# Altium PCB lab1_patrusheva_usb_spi.PcbDoc
Units mm, origin at the board's own origin, x right, y up, seen from the top; angles counter-clockwise.
Board outline 46.35 x 20.55 mm, 4 copper layers (Top Layer, Signal Layer 1, Signal Layer 2, Bottom Layer), stack 1.522 mm thick; 22 components, 24 nets, 79 pads, 70 vias.
Unrouted connection lines stored in the file: 8.
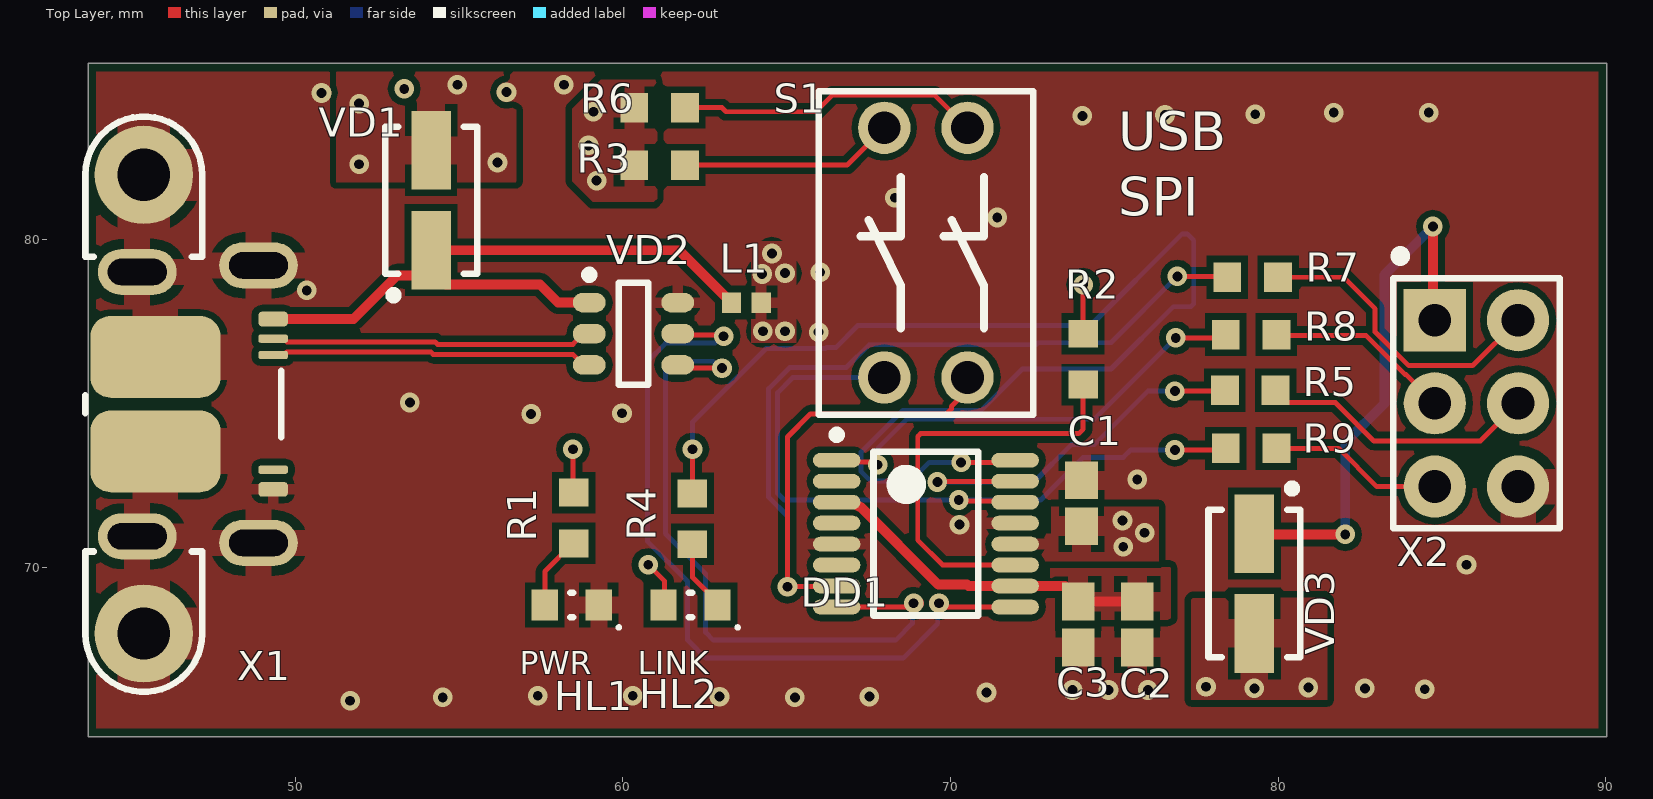
[diagram p0: Top Layer view]
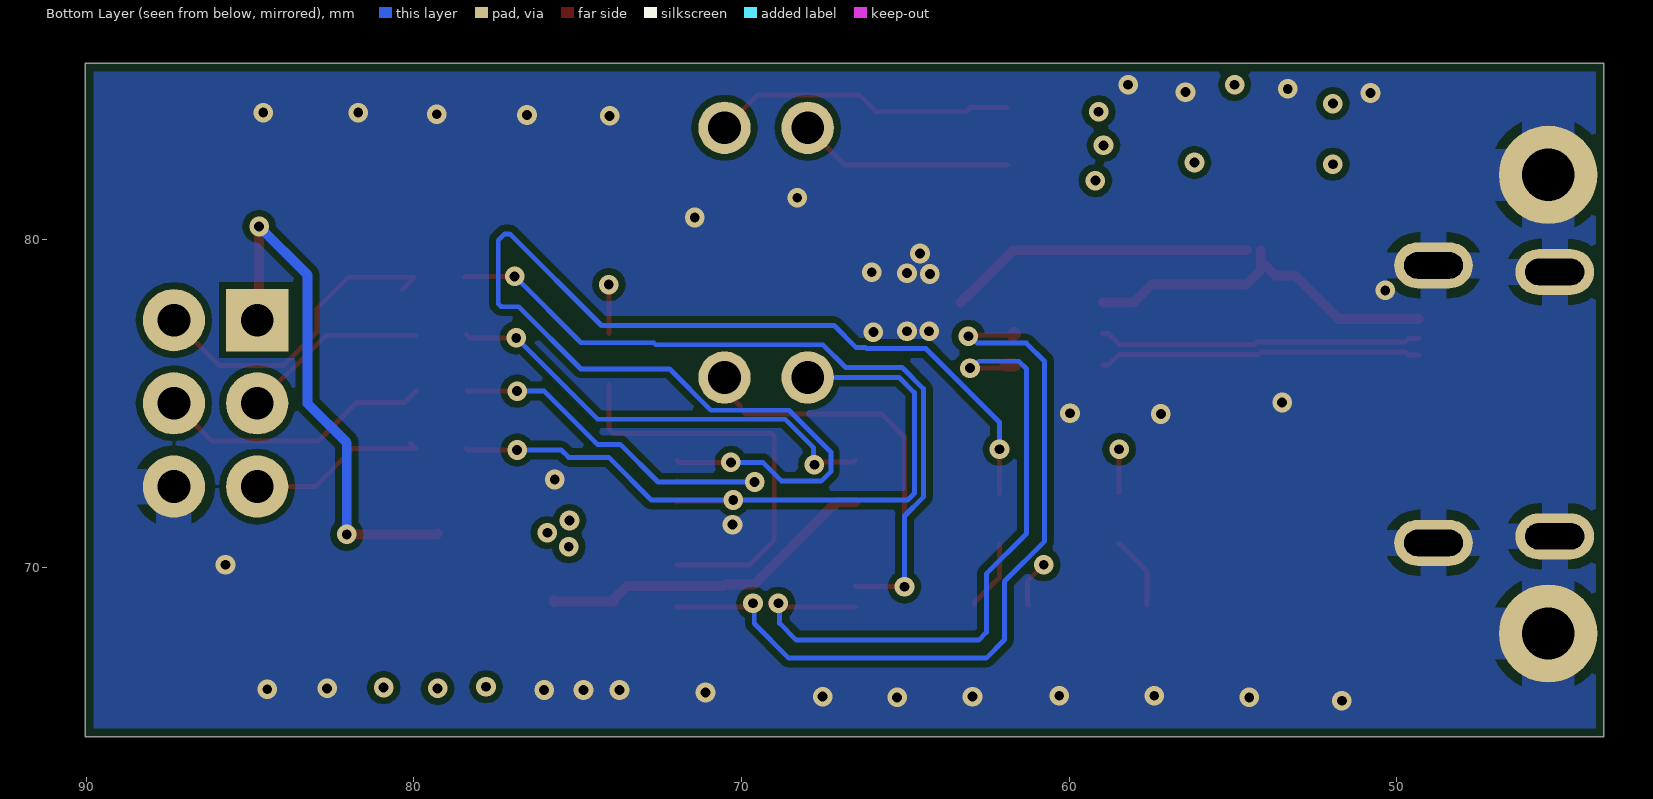
[diagram p1: Bottom Layer view, seen from below]
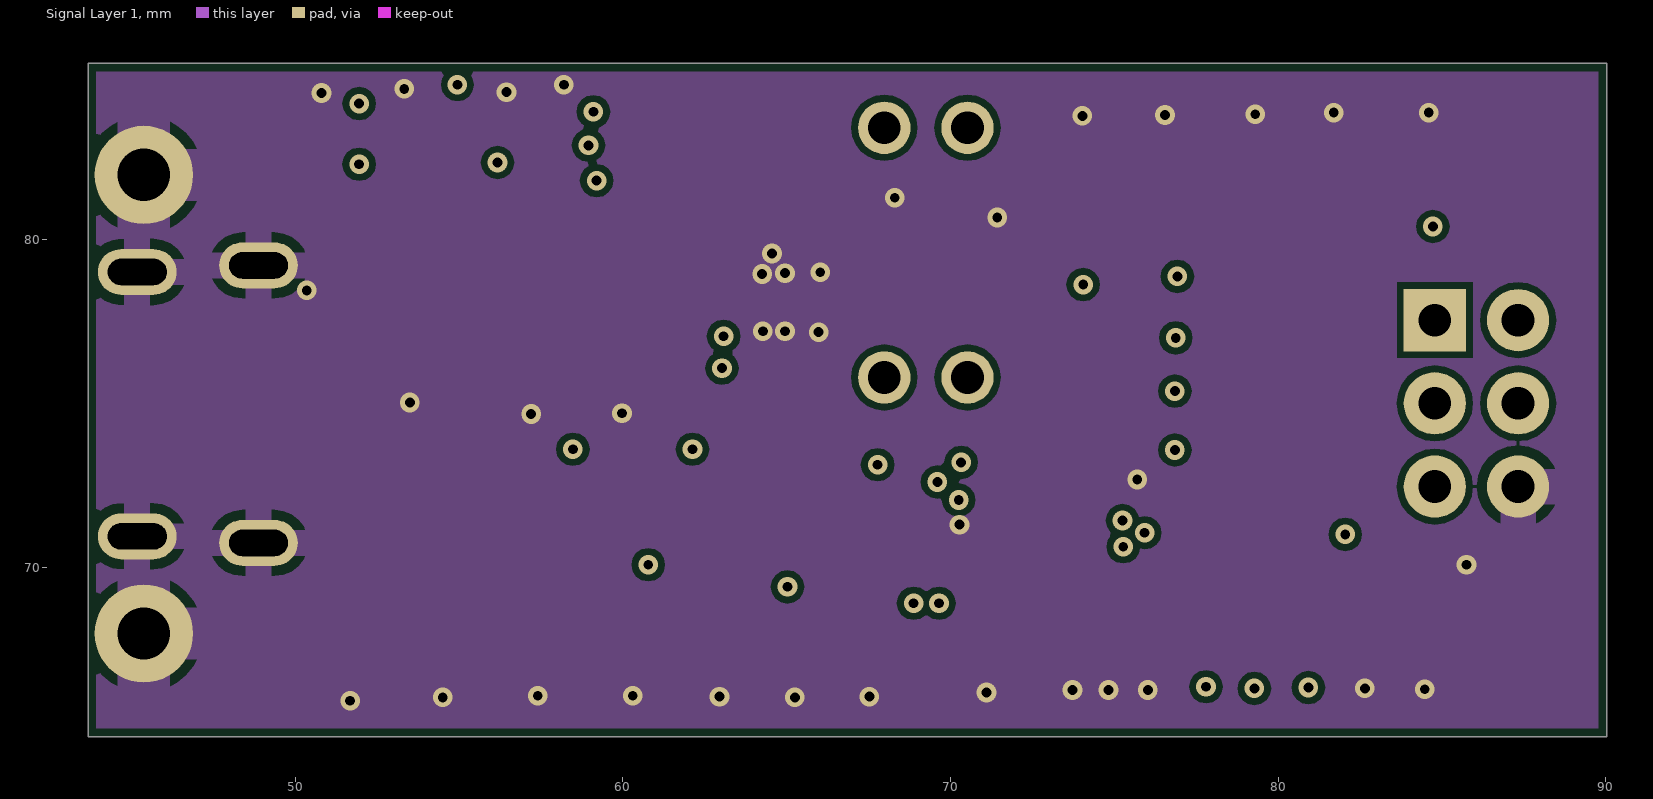
[diagram p2: Signal Layer 1]
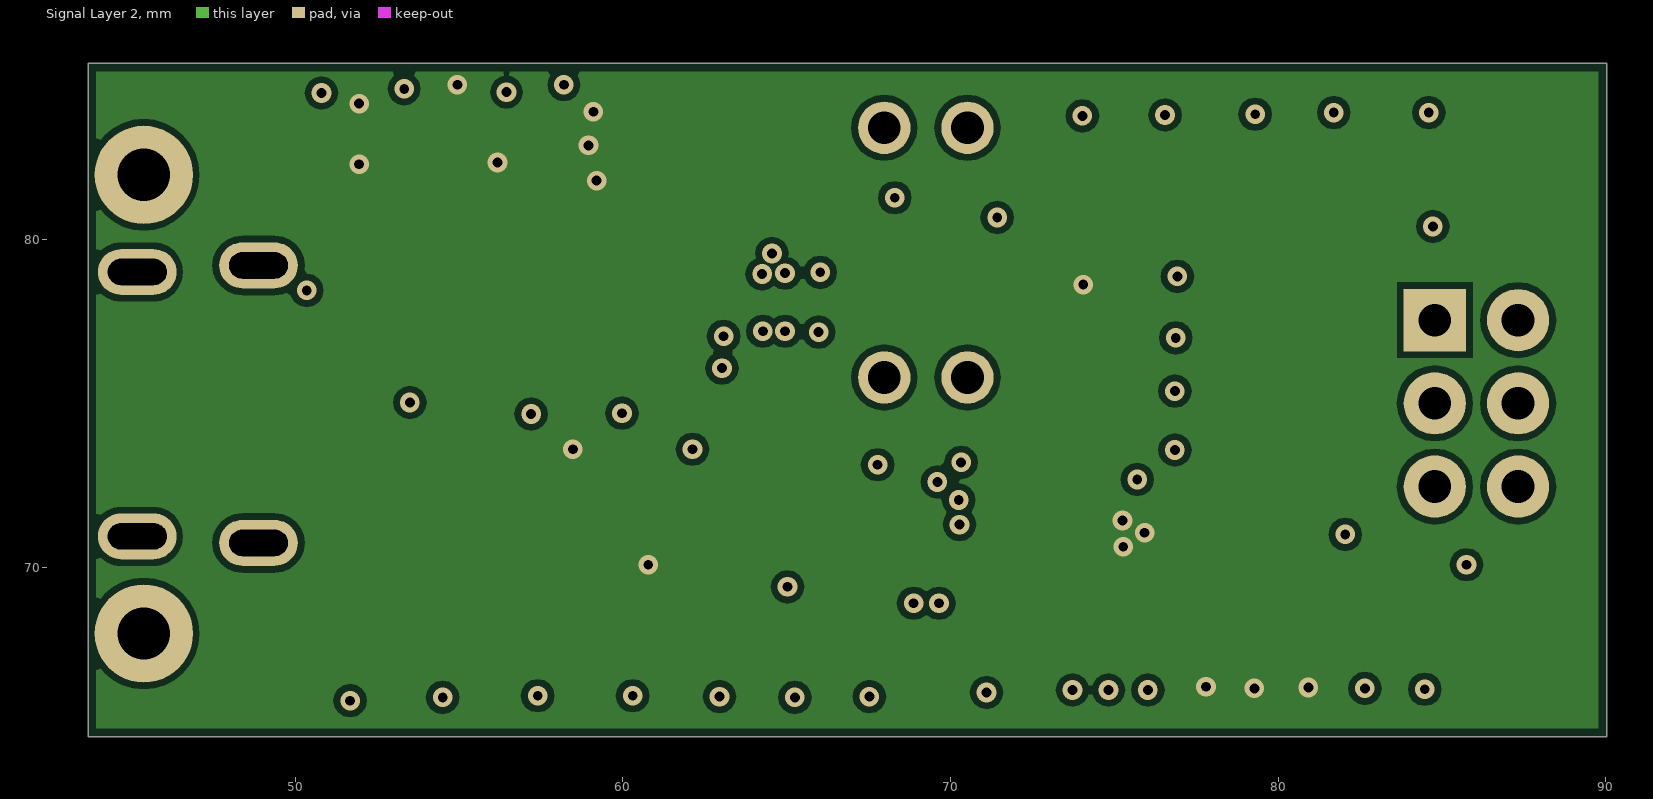
[diagram p3: Signal Layer 2]

## Layer stack, top to bottom
Top Solder: solder mask 0.0102, Solder Resist, Dk 3.5
Top Layer: signal copper 0.018
Prepreg 1: prepreg 0.125, FR4 HiTg170, Dk 5.07
Signal Layer 1: signal copper 0.018
Core 1: core 1.2, FR4, Dk 4.6
Signal Layer 2: signal copper 0.018
Prepreg 2: prepreg 0.125, FR4 HiTg170, Dk 5.07
Bottom Layer: signal copper 0.018
Bottom Solder: solder mask 0.0102, Solder Resist, Dk 3.5

## Board outline
43.675,64.825 90.025,64.825 90.025,85.375 43.675,85.375

## Design rules (kind name [scope] priority, off if disabled: settings)
AcuteAngle min_acute_angle [OnCopper] p1: minimum=3.50000000000000E+0001 checktracksonly=FALSE // Минимальный угол между примитивами топологии
BoardOutlineClearance board_outline_clearance_std [NOT (OnLayer('Bottom Overlay') OR OnLayer('Top Overlay'))] p1: gap=0.25 ignorepadtopadclearanceinfootprint=FALSE except(0: Arc-SplitContinuation Track-SplitContinuation SMDPad-SplitContinuation THPad-SplitContinuation Via-SplitContinuation Fill-SplitContinuation Poly-SplitContinuation Region-SplitContinuation Text-SplitContinuation) // Отступ элементов топологии от края фрезеруемой печатной платы
Clearance clearance_outer_18um_std [OnTopLayer OR OnBottomLayer] p1: gap=0.125 ignorepadtopadclearanceinfootprint=TRUE except(0.2: Arc-Fill Arc-Poly Track-Fill Track-Poly SMDPad-SMDPad SMDPad-Fill SMDPad-Poly THPad-Fill THPad-Poly Via-Fill Via-Poly Fill-Fill Fill-Poly Poly-Poly Poly-Region Poly-Text; 0.25: Arc-Hole Track-Hole SMDPad-Hole THPad-Hole Via-Hole Fill-Hole Poly-Hole Region-Hole Text-Hole) // Зазоры на внешних слоях
Clearance clearance_inner_18um_std [NOT (OnTopLayer Or OnBottomLayer)] p2: gap=0.125 ignorepadtopadclearanceinfootprint=FALSE except(0.2: Arc-Fill Arc-Poly Track-Fill Track-Poly SMDPad-SMDPad SMDPad-Fill SMDPad-Poly THPad-Fill THPad-Poly Via-Fill Via-Poly Fill-Fill Fill-Poly Poly-Poly Poly-Region Poly-Text; 0.25: Arc-Hole Track-Hole SMDPad-Hole THPad-Hole Via-Hole Fill-Hole Poly-Hole Region-Hole Text-Hole) // Зазоры на внутренних слоях
ComponentClearance [All] p1: gap=0 collisioncheckmode=3 verticalgap=0 showdistances=FALSE
DiffPairsRouting "Schematic Differential Pairs Routing_15" [InNet('CN_D_N')] p1: maxlimit=0.254 minlimit=0.15 mostfreqgap=0.254 toplayer_maxgap=0.15 toplayer_prefgap=0.15 toplayer_minwidth=0.155 toplayer_maxwidth=0.155 toplayer_prefwidth=0.155 bottomlayer_maxgap=0.15 bottomlayer_prefgap=0.15 bottomlayer_minwidth=0.155 bottomlayer_maxwidth=0.155 bottomlayer_prefwidth=0.155 impedanceprofiledriven=TRUE impedanceprofileid={1B1F1868-2FFB-4D51-908A-913D90CA9AFC} impedanceprofilevalue=95.000000 maxuncoupledlength=12.7
DiffPairsRouting "Schematic Differential Pairs Routing_14" [InNet('CN_D_P')] p2: maxlimit=0.254 minlimit=0.15 mostfreqgap=0.254 toplayer_maxgap=0.15 toplayer_prefgap=0.15 toplayer_minwidth=0.155 toplayer_maxwidth=0.155 toplayer_prefwidth=0.155 bottomlayer_maxgap=0.15 bottomlayer_prefgap=0.15 bottomlayer_minwidth=0.155 bottomlayer_maxwidth=0.155 bottomlayer_prefwidth=0.155 impedanceprofiledriven=TRUE impedanceprofileid={1B1F1868-2FFB-4D51-908A-913D90CA9AFC} impedanceprofilevalue=95.000000 maxuncoupledlength=12.7
DiffPairsRouting "Schematic Differential Pairs Routing_13" [InNet('USB_D_N')] p3: maxlimit=0.254 minlimit=0.15 mostfreqgap=0.254 toplayer_maxgap=0.15 toplayer_prefgap=0.15 toplayer_minwidth=0.155 toplayer_maxwidth=0.155 toplayer_prefwidth=0.155 bottomlayer_maxgap=0.15 bottomlayer_prefgap=0.15 bottomlayer_minwidth=0.155 bottomlayer_maxwidth=0.155 bottomlayer_prefwidth=0.155 impedanceprofiledriven=TRUE impedanceprofileid={1B1F1868-2FFB-4D51-908A-913D90CA9AFC} impedanceprofilevalue=95.000000 maxuncoupledlength=12.7
DiffPairsRouting "Schematic Differential Pairs Routing_12" [InNet('USB_D_P')] p4: maxlimit=0.254 minlimit=0.15 mostfreqgap=0.254 toplayer_maxgap=0.15 toplayer_prefgap=0.15 toplayer_minwidth=0.155 toplayer_maxwidth=0.155 toplayer_prefwidth=0.155 bottomlayer_maxgap=0.15 bottomlayer_prefgap=0.15 bottomlayer_minwidth=0.155 bottomlayer_maxwidth=0.155 bottomlayer_prefwidth=0.155 impedanceprofiledriven=TRUE impedanceprofileid={1B1F1868-2FFB-4D51-908A-913D90CA9AFC} impedanceprofilevalue=95.000000 maxuncoupledlength=12.7
DiffPairsRouting "Schematic Differential Pairs Routing_11" [InNet('USB_D_N')] p5: maxlimit=0.254 minlimit=0.15 mostfreqgap=0.254 toplayer_maxgap=0.15 toplayer_prefgap=0.15 toplayer_minwidth=0.155 toplayer_maxwidth=0.155 toplayer_prefwidth=0.155 bottomlayer_maxgap=0.15 bottomlayer_prefgap=0.15 bottomlayer_minwidth=0.155 bottomlayer_maxwidth=0.155 bottomlayer_prefwidth=0.155 impedanceprofiledriven=TRUE impedanceprofileid={1B1F1868-2FFB-4D51-908A-913D90CA9AFC} impedanceprofilevalue=95.000000 maxuncoupledlength=12.7
DiffPairsRouting "Schematic Differential Pairs Routing_10" [InNet('USB_D_P')] p6: maxlimit=0.254 minlimit=0.15 mostfreqgap=0.254 toplayer_maxgap=0.15 toplayer_prefgap=0.15 toplayer_minwidth=0.155 toplayer_maxwidth=0.155 toplayer_prefwidth=0.155 bottomlayer_maxgap=0.15 bottomlayer_prefgap=0.15 bottomlayer_minwidth=0.155 bottomlayer_maxwidth=0.155 bottomlayer_prefwidth=0.155 impedanceprofiledriven=TRUE impedanceprofileid={1B1F1868-2FFB-4D51-908A-913D90CA9AFC} impedanceprofilevalue=95.000000 maxuncoupledlength=12.7
DiffPairsRouting "Schematic Differential Pairs Routing_9" [InNet('CN_D_N')] p7: maxlimit=0.254 minlimit=0.15 mostfreqgap=0.254 toplayer_maxgap=0.15 toplayer_prefgap=0.15 toplayer_minwidth=0.155 toplayer_maxwidth=0.155 toplayer_prefwidth=0.155 bottomlayer_maxgap=0.15 bottomlayer_prefgap=0.15 bottomlayer_minwidth=0.155 bottomlayer_maxwidth=0.155 bottomlayer_prefwidth=0.155 impedanceprofiledriven=TRUE impedanceprofileid={1B1F1868-2FFB-4D51-908A-913D90CA9AFC} impedanceprofilevalue=95.000000 maxuncoupledlength=12.7
DiffPairsRouting "Schematic Differential Pairs Routing_8" [InNet('CN_D_N')] p8: maxlimit=0.254 minlimit=0.15 mostfreqgap=0.254 toplayer_maxgap=0.15 toplayer_prefgap=0.15 toplayer_minwidth=0.155 toplayer_maxwidth=0.155 toplayer_prefwidth=0.155 bottomlayer_maxgap=0.15 bottomlayer_prefgap=0.15 bottomlayer_minwidth=0.155 bottomlayer_maxwidth=0.155 bottomlayer_prefwidth=0.155 impedanceprofiledriven=TRUE impedanceprofileid={1B1F1868-2FFB-4D51-908A-913D90CA9AFC} impedanceprofilevalue=95.000000 maxuncoupledlength=12.7
DiffPairsRouting "Schematic Differential Pairs Routing_7" [InNet('CN_D_P')] p9: maxlimit=0.254 minlimit=0.15 mostfreqgap=0.254 toplayer_maxgap=0.15 toplayer_prefgap=0.15 toplayer_minwidth=0.155 toplayer_maxwidth=0.155 toplayer_prefwidth=0.155 bottomlayer_maxgap=0.15 bottomlayer_prefgap=0.15 bottomlayer_minwidth=0.155 bottomlayer_maxwidth=0.155 bottomlayer_prefwidth=0.155 impedanceprofiledriven=TRUE impedanceprofileid={1B1F1868-2FFB-4D51-908A-913D90CA9AFC} impedanceprofilevalue=95.000000 maxuncoupledlength=12.7
DiffPairsRouting "Schematic Differential Pairs Routing_6" [InNet('CN_D_P')] p10: maxlimit=0.254 minlimit=0.15 mostfreqgap=0.254 toplayer_maxgap=0.15 toplayer_prefgap=0.15 toplayer_minwidth=0.155 toplayer_maxwidth=0.155 toplayer_prefwidth=0.155 bottomlayer_maxgap=0.15 bottomlayer_prefgap=0.15 bottomlayer_minwidth=0.155 bottomlayer_maxwidth=0.155 bottomlayer_prefwidth=0.155 impedanceprofiledriven=TRUE impedanceprofileid={1B1F1868-2FFB-4D51-908A-913D90CA9AFC} impedanceprofilevalue=95.000000 maxuncoupledlength=12.7
DiffPairsRouting "Schematic Differential Pairs Routing_5" [InNet('USB_D_P')] p11: maxlimit=0.254 minlimit=0.15 mostfreqgap=0.254 toplayer_maxgap=0.15 toplayer_prefgap=0.15 toplayer_minwidth=0.155 toplayer_maxwidth=0.155 toplayer_prefwidth=0.155 bottomlayer_maxgap=0.15 bottomlayer_prefgap=0.15 bottomlayer_minwidth=0.155 bottomlayer_maxwidth=0.155 bottomlayer_prefwidth=0.155 impedanceprofiledriven=TRUE impedanceprofileid={1B1F1868-2FFB-4D51-908A-913D90CA9AFC} impedanceprofilevalue=95.000000 maxuncoupledlength=12.7
DiffPairsRouting "Schematic Differential Pairs Routing_4" [InNet('USB_D_P')] p12: maxlimit=0.254 minlimit=0.15 mostfreqgap=0.254 toplayer_maxgap=0.15 toplayer_prefgap=0.15 toplayer_minwidth=0.155 toplayer_maxwidth=0.155 toplayer_prefwidth=0.155 bottomlayer_maxgap=0.15 bottomlayer_prefgap=0.15 bottomlayer_minwidth=0.155 bottomlayer_maxwidth=0.155 bottomlayer_prefwidth=0.155 impedanceprofiledriven=TRUE impedanceprofileid={1B1F1868-2FFB-4D51-908A-913D90CA9AFC} impedanceprofilevalue=95.000000 maxuncoupledlength=12.7
DiffPairsRouting "Schematic Differential Pairs Routing_3" [InNet('CN_D_N')] p13: maxlimit=0.15 minlimit=0.15 mostfreqgap=0.15 toplayer_minwidth=0.402 toplayer_maxwidth=0.485 toplayer_prefwidth=0.485 midlayer1_minwidth=0.381 midlayer1_maxwidth=0.381 midlayer1_prefwidth=0.381 midlayer2_minwidth=0.381 midlayer2_maxwidth=0.381 midlayer2_prefwidth=0.381 bottomlayer_minwidth=0.402 bottomlayer_maxwidth=0.485 bottomlayer_prefwidth=0.485 maxuncoupledlength=12.7
DiffPairsRouting "Schematic Differential Pairs Routing_2" [InNet('CN_D_P')] p14: maxlimit=0.15 minlimit=0.15 mostfreqgap=0.15 toplayer_minwidth=0.402 toplayer_maxwidth=0.485 toplayer_prefwidth=0.485 midlayer1_minwidth=0.381 midlayer1_maxwidth=0.381 midlayer1_prefwidth=0.381 midlayer2_minwidth=0.381 midlayer2_maxwidth=0.381 midlayer2_prefwidth=0.381 bottomlayer_minwidth=0.402 bottomlayer_maxwidth=0.485 bottomlayer_prefwidth=0.485 maxuncoupledlength=12.7
DiffPairsRouting diff_pairs_routing [All] p15: maxlimit=0.254 minlimit=0.127 mostfreqgap=0.254 toplayer_maxgap=0.127 toplayer_prefgap=0.127 toplayer_minwidth=0.143 toplayer_maxwidth=0.143 toplayer_prefwidth=0.143 midlayer1_minwidth=0.381 midlayer1_maxwidth=0.381 midlayer1_prefwidth=0.381 midlayer2_minwidth=0.381 midlayer2_maxwidth=0.381 midlayer2_prefwidth=0.381 bottomlayer_maxgap=0.127 bottomlayer_prefgap=0.127 bottomlayer_minwidth=0.143 bottomlayer_maxwidth=0.143 bottomlayer_prefwidth=0.143 impedanceprofiledriven=TRUE impedanceprofileid={FD46899E-B5A2-4EF5-A302-5D2DB6A51F35} maxuncoupledlength=12.7 // Правила трассировки дифференциальных пар
HoleSize min_hole_size_std [IsPad] p1: absolutevalues=TRUE maxlimit=5.9 minlimit=0.6 maxpercent=80.000 minpercent=20.000 // Диаметр межслойного переходного отверстия
HoleSize min_hole_size_via_std [IsVia] p2: absolutevalues=TRUE maxlimit=5.9 minlimit=0.3 maxpercent=80.000 minpercent=20.000 // Минимальный диаметр монтажного отверстия
HoleToHoleClearance hole_to_hole_clearance_std [All] p1: gap=0.2 allowstackedmicrovias=FALSE // Минимальное расстояние между краями двух отверстий
MinimumAnnularRing min_via_ar_std [All] p1: minimumring=0.15 // Поясок площадки переходного отверстия (Annular ring VIA)
MinimumAnnularRing min_pad_ar_std [All] p2: minimumring=0.2 // Поясок монтажной контактной площадки (Annular ring PAD)
MinimumSolderMaskSliver min_solder_mask_bridge_std [All] p1: minsoldermaskwidth=0.15 // Мнимальная ширина масочного мостика
PlaneClearance plane_clearance_18um_std [All] p1: clearance=0.2 // Отступ полигона (для слоя plane) от элементов топологии
PlaneConnect [All] p1: planeconnectstyle=Relief reliefexpansion=0.5 reliefentries=4 reliefconductorwidth=0.2 reliefairgap=0.2
PolygonConnect poly_connect_to_pad<=0.3 [(AsMM(PadXSize_AllLayers)<=0.301) or (AsMM(PadYSize_AllLayers)<=0.301)] p1: thpad.connectstyle=Relief thpad.reliefconductorwidth=0.2 thpad.reliefentries=4 thpad.polygonreliefangle="90 Angle" thpad.airgapwidth=0.2 smdpad.connectstyle=Relief smdpad.reliefconductorwidth=0.2 smdpad.reliefentries=4 smdpad.polygonreliefangle="90 Angle" smdpad.airgapwidth=0.2 via.connectstyle=Direct via.reliefconductorwidth=0.254 via.reliefentries=4 via.polygonreliefangle="90 Angle" via.airgapwidth=0.254 // Правила подключения полигонов для падов от 0,3мм и меньше
PolygonConnect poly_connect_to_pad<=0.4 [(AsMM(PadXSize_AllLayers)<=0.401) or (AsMM(PadYSize_AllLayers)<=0.401)] p2: thpad.connectstyle=Relief thpad.reliefconductorwidth=0.26 thpad.reliefentries=4 thpad.polygonreliefangle="90 Angle" thpad.airgapwidth=0.2 smdpad.connectstyle=Relief smdpad.reliefconductorwidth=0.26 smdpad.reliefentries=4 smdpad.polygonreliefangle="90 Angle" smdpad.airgapwidth=0.2 via.connectstyle=Direct via.reliefconductorwidth=0.254 via.reliefentries=4 via.polygonreliefangle="90 Angle" via.airgapwidth=0.254 // Правила подключения полигонов для падов от 0,4 и меньше
PolygonConnect poly_connect_to_pad<=0.6 [(AsMM(PadXSize_AllLayers)<=0.601) or (AsMM(PadYSize_AllLayers)<=0.601)] p3: thpad.connectstyle=Relief thpad.reliefconductorwidth=0.33 thpad.reliefentries=4 thpad.polygonreliefangle="90 Angle" thpad.airgapwidth=0.2 smdpad.connectstyle=Relief smdpad.reliefconductorwidth=0.33 smdpad.reliefentries=4 smdpad.polygonreliefangle="90 Angle" smdpad.airgapwidth=0.2 via.connectstyle=Direct via.reliefconductorwidth=0.254 via.reliefentries=4 via.polygonreliefangle="90 Angle" via.airgapwidth=0.254 // Правила подключения полигонов для падов от 0,6мм и меньше
PolygonConnect poly_connect_to_pad<=0.7 [(AsMM(PadXSize_AllLayers)<=0.701) or (AsMM(PadYSize_AllLayers)<=0.701)] p4: thpad.connectstyle=Relief thpad.reliefconductorwidth=0.46 thpad.reliefentries=4 thpad.polygonreliefangle="90 Angle" thpad.airgapwidth=0.2 smdpad.connectstyle=Relief smdpad.reliefconductorwidth=0.46 smdpad.reliefentries=4 smdpad.polygonreliefangle="90 Angle" smdpad.airgapwidth=0.2 via.connectstyle=Direct via.reliefconductorwidth=0.254 via.reliefentries=4 via.polygonreliefangle="90 Angle" via.airgapwidth=0.254 // Правила подключения полигонов для падов от 0,7мм и меньше
PolygonConnect poly_connect_to_pad<=0.8 [(AsMM(PadXSize_AllLayers)<=0.8)or(AsMM(PadYSize_AllLayers)<=0.8)] p5: thpad.connectstyle=Relief thpad.reliefconductorwidth=0.53 thpad.reliefentries=4 thpad.polygonreliefangle="90 Angle" thpad.airgapwidth=0.3 smdpad.connectstyle=Relief smdpad.reliefconductorwidth=0.53 smdpad.reliefentries=4 smdpad.polygonreliefangle="90 Angle" smdpad.airgapwidth=0.2 via.connectstyle=Direct via.reliefconductorwidth=0.254 via.reliefentries=4 via.polygonreliefangle="90 Angle" via.airgapwidth=0.254 // Правила подключения полигонов для падов от 0,8мм и меньше
PolygonConnect poly_connect_to_pad<=1 [(AsMM(PadXSize_AllLayers)<=1.01)or(AsMM(PadYSize_AllLayers)<=1.01)] p6: thpad.connectstyle=Relief thpad.reliefconductorwidth=0.6 thpad.reliefentries=4 thpad.polygonreliefangle="90 Angle" thpad.airgapwidth=0.3 smdpad.connectstyle=Relief smdpad.reliefconductorwidth=0.6 smdpad.reliefentries=4 smdpad.polygonreliefangle="90 Angle" smdpad.airgapwidth=0.2 via.connectstyle=Direct via.reliefconductorwidth=0.254 via.reliefentries=4 via.polygonreliefangle="90 Angle" via.airgapwidth=0.254 // Правила подключения полигонов для падов от 1мм и меньше
PolygonConnect poly_connect_to_pad<=1.3 [(AsMM(PadXSize_AllLayers)<=1.31)or(AsMM(PadYSize_AllLayers)<=1.31)] p7: thpad.connectstyle=Relief thpad.reliefconductorwidth=0.66 thpad.reliefentries=4 thpad.polygonreliefangle="90 Angle" thpad.airgapwidth=0.3 smdpad.connectstyle=Relief smdpad.reliefconductorwidth=0.86 smdpad.reliefentries=4 smdpad.polygonreliefangle="90 Angle" smdpad.airgapwidth=0.2 via.connectstyle=Direct via.reliefconductorwidth=0.254 via.reliefentries=4 via.polygonreliefangle="90 Angle" via.airgapwidth=0.254 // Правила подключения полигонов для падов от 1,3мм и меньше
PolygonConnect poly_connect_to_pad<=1.6 [(AsMM(PadXSize_AllLayers)<=1.61)or(AsMM(PadYSize_AllLayers)<=1.61)] p8: thpad.connectstyle=Relief thpad.reliefconductorwidth=0.8 thpad.reliefentries=4 thpad.polygonreliefangle="90 Angle" thpad.airgapwidth=0.3 smdpad.connectstyle=Relief smdpad.reliefconductorwidth=1 smdpad.reliefentries=4 smdpad.polygonreliefangle="90 Angle" smdpad.airgapwidth=0.2 via.connectstyle=Direct via.reliefconductorwidth=0.254 via.reliefentries=4 via.polygonreliefangle="90 Angle" via.airgapwidth=0.254 // Правила подключения полигонов для падов от 1,6мм и меньше
PolygonConnect poly_connect_to_pad<=1.8 [(AsMM(PadXSize_AllLayers)<=1.8)or(AsMM(PadYSize_AllLayers)<=1.8)] p9: thpad.connectstyle=Relief thpad.reliefconductorwidth=1 thpad.reliefentries=4 thpad.polygonreliefangle="90 Angle" thpad.airgapwidth=0.3 smdpad.connectstyle=Relief smdpad.reliefconductorwidth=1.2 smdpad.reliefentries=4 smdpad.polygonreliefangle="90 Angle" smdpad.airgapwidth=0.2 via.connectstyle=Direct via.reliefconductorwidth=0.254 via.reliefentries=4 via.polygonreliefangle="90 Angle" via.airgapwidth=0.254 // Правила подключения полигонов для падов от 1,8мм и меньше
PolygonConnect poly_connect_to_pad<=2 [(AsMM(PadXSize_AllLayers)<=2.01)or(AsMM(PadYSize_AllLayers)<=2.01)] p10: thpad.connectstyle=Relief thpad.reliefconductorwidth=1.1 thpad.reliefentries=4 thpad.polygonreliefangle="90 Angle" thpad.airgapwidth=0.3 smdpad.connectstyle=Relief smdpad.reliefconductorwidth=1.4 smdpad.reliefentries=4 smdpad.polygonreliefangle="90 Angle" smdpad.airgapwidth=0.2 via.connectstyle=Direct via.reliefconductorwidth=0.254 via.reliefentries=4 via.polygonreliefangle="90 Angle" via.airgapwidth=0.254 // Правила подключения полигонов для падов от 2мм и меньше
PolygonConnect poly_connect_to_pad<=2.3 [(AsMM(PadXSize_AllLayers)<=2.31)or(AsMM(PadYSize_AllLayers)<=2.31)] p11: thpad.connectstyle=Relief thpad.reliefconductorwidth=1.2 thpad.reliefentries=4 thpad.polygonreliefangle="90 Angle" thpad.airgapwidth=0.3 smdpad.connectstyle=Relief smdpad.reliefconductorwidth=1.4 smdpad.reliefentries=4 smdpad.polygonreliefangle="90 Angle" smdpad.airgapwidth=0.2 via.connectstyle=Direct via.reliefconductorwidth=0.254 via.reliefentries=4 via.polygonreliefangle="90 Angle" via.airgapwidth=0.254 // Правила подключения полигонов для падов от 2,3мм и меньше
PolygonConnect poly_connect_to_pad<=2.5 [(AsMM(PadXSize_AllLayers)<=2.51)or(AsMM(PadYSize_AllLayers)<=2.51)] p12: thpad.connectstyle=Relief thpad.reliefconductorwidth=1.2 thpad.reliefentries=4 thpad.polygonreliefangle="90 Angle" thpad.airgapwidth=0.3 smdpad.connectstyle=Relief smdpad.reliefconductorwidth=1.4 smdpad.reliefentries=4 smdpad.polygonreliefangle="90 Angle" smdpad.airgapwidth=0.2 via.connectstyle=Direct via.reliefconductorwidth=0.254 via.reliefentries=4 via.polygonreliefangle="90 Angle" via.airgapwidth=0.254 // Правила подключения полигонов для падов от 2,5мм и меньше
PolygonConnect poly_connect_to_pad<=2.7 [(AsMM(PadXSize_AllLayers)<=2.71)or(AsMM(PadYSize_AllLayers)<=2.71)] p13: thpad.connectstyle=Relief thpad.reliefconductorwidth=1.4 thpad.reliefentries=4 thpad.polygonreliefangle="90 Angle" thpad.airgapwidth=0.3 smdpad.connectstyle=Relief smdpad.reliefconductorwidth=1.6 smdpad.reliefentries=4 smdpad.polygonreliefangle="90 Angle" smdpad.airgapwidth=0.2 via.connectstyle=Direct via.reliefconductorwidth=0.254 via.reliefentries=4 via.polygonreliefangle="90 Angle" via.airgapwidth=0.254 // Правила подключения полигонов для падов от 2,7мм и меньше
PolygonConnect poly_connect_to_pad<=3 [(AsMM(PadXSize_AllLayers)<=3.01)or(AsMM(PadYSize_AllLayers)<=3.01)] p14: thpad.connectstyle=Relief thpad.reliefconductorwidth=1.6 thpad.reliefentries=4 thpad.polygonreliefangle="90 Angle" thpad.airgapwidth=0.3 smdpad.connectstyle=Relief smdpad.reliefconductorwidth=1.8 smdpad.reliefentries=4 smdpad.polygonreliefangle="90 Angle" smdpad.airgapwidth=0.2 via.connectstyle=Direct via.reliefconductorwidth=0.254 via.reliefentries=4 via.polygonreliefangle="90 Angle" via.airgapwidth=0.254 // Правила подключения полигонов для падов от 3мм и меньше
PolygonConnect poly_connect_to_pad<=7 [(AsMM(PadXSize_AllLayers)<7.01)or(AsMM(PadYSize_AllLayers)<=7.01)] p15: thpad.connectstyle=Relief thpad.reliefconductorwidth=2 thpad.reliefentries=4 thpad.polygonreliefangle="90 Angle" thpad.airgapwidth=0.4 smdpad.connectstyle=Relief smdpad.reliefconductorwidth=2 smdpad.reliefentries=4 smdpad.polygonreliefangle="90 Angle" smdpad.airgapwidth=0.3 via.connectstyle=Direct via.reliefconductorwidth=0.254 via.reliefentries=4 via.polygonreliefangle="90 Angle" via.airgapwidth=0.254 // Правила подключения полигонов для падов от 7мм и меньше
PolygonConnect poly_connect_to_pad [All] p16: thpad.connectstyle=Relief thpad.reliefconductorwidth=0.25 thpad.reliefentries=4 thpad.polygonreliefangle="90 Angle" thpad.airgapwidth=0.2 smdpad.connectstyle=Relief smdpad.reliefconductorwidth=0.25 smdpad.reliefentries=4 smdpad.polygonreliefangle="90 Angle" smdpad.airgapwidth=0.2 via.connectstyle=Direct via.reliefconductorwidth=0.25 via.reliefentries=4 via.polygonreliefangle="90 Angle" via.airgapwidth=0.2 // Правила подключения полигонов общие
RoutingCorners [All] p1 off: cornerstyle=45-Degree minsetback=2.5 maxsetback=2.5
RoutingVias [All] p1: holewidth=0.3 width=0.6 viastyle="Through Hole" minholewidth=0.3 minwidth=0.6 maxholewidth=5.9 maxwidth=6.4
SilkToSilkClearance silk_to_silk_clearance_std [All] p1 off: silktosilkclearance=0.15 // Отступ текста шелкографии от других примитивов шелкографии
SilkToSolderMaskClearance silk_to_solder_mask_clearance_std [IsPad] p1 off: minsilkscreentomaskgap=0.15 clearancetoexposedcopper=FALSE // Минимальное расстояние между элементами шелкографии и вскрытой медью
SolderMaskExpansion solder_mask_expansion_std [All] p1: expansion=0.05 // Припуск паяльной масски
UnRoutedNet [All] p1: checkbadconnections=TRUE
Width width_18um_std [All] p1: maxlimit=10 minlimit=0.125 preferedwidth=0.15 checkconnectedcopper=TRUE // Ширина проводников (общая)
19 further rules are at their usual default settings.

## Classes and differential pairs
differential pair class USB_SIGNALS: CN_D USB_D
differential pair USB_D: +USB_D_P -USB_D_N
differential pair CN_D: +CN_D_P -CN_D_N

## Components (designator, comment, footprint, x,y, rotation, side; value= is the part's Value field where it differs from the comment)
C1 "4,7 мк" C0603 74,71.95 r270 top
C2 "1 мк" C0603 75.7,68.25 r90 top
C3 "0,1 мк" C0603 73.9,68.25 r90 top
DD1 "FT220XS" SSOP-16 69.25,71.025 r0 top
HL1 "TLMB1100-GS08" HL0603 58.441,68.847 r180 top
HL2 "TLMY1000-GS08" HL0603 62.067,68.847 r180 top
L1 "BLM15BB470SN1" BLM31PG330SN1 63.77,78.075 r0 top
R1 "220" R0603 58.5,71.5 r90 top
R2 "10 к" R0603 74.05,76.35 r270 top
R3 "10 к" R0603 61.125,82.275 r180 top
R4 "220" R0603 62.125,71.475 r270 top
R5 "22" R0603 79.15,75.4 r0 top
R6 "10 к" R0603 61.125,84.025 r180 top
R7 "22" R0603 79.225,78.85 r0 top
R8 "22" R0603 79.175,77.1 r0 top
R9 "22" R0603 79.175,73.625 r0 top
S1 "DS1040-02RN" DS1040-02RN 69.25,79.85 r0 top
VD1 "SL13-E3/5AT" DO-214AC 54.15,81.2 r90 top
VD2 "STF202-22T1G" tsop-6 60.325,77.125 r0 top
VD3 "SL13-E3/5AT" DO-214AC 79.275,69.5 r270 top
X1 "2108877-1" 2108877-1 45.629,74.975 r90 top
X2 "DS1021-2*3SF11" DS1021-2X3SF11 86.055,75 r270 top

## Footprints (in the part's own frame and the unit in brackets; to place one, negate y for a bottom-side part, rotate by r counter-clockwise, add the part's x,y. Pads: shape width x height; smd on the part's side, far side on the other; paste and mask are expansions set on the pad)
2108877-1 [mm] "Micro USB-B, Flanged"
  rrect50% 0.45x0.9 smd: 1(2.6,-3.696) 5(-2.6,-3.696)
  rrect50% 0.25x0.9 smd: 2(2,-3.696) 3(1.5,-3.696) 4(-2,-3.696)
  round 3 hole 1.6: TP1(-7,0.25) TP1(7,0.25)
  oval 1.4x2.4 hole 0.8 slot 1.8 at 90 deg mask+0.102: TP1(-4.235,-3.25) TP1(-4.035,0.45) TP1(4.035,0.45) TP1(4.235,-3.25)
  rrect50% 2.5x3.98 smd: TP1(-1.441,-0.104) TP1(1.441,-0.104)
  silkscreen extent -8.78,-3.95 8.78,2.03, body extent -8.9,-3.95 8.9,3.95, height 3.39
BLM31PG330SN1 [mm] "Chip Inductor, 2-Leads, Body 1,00x0,50mm, IPC Medium Density"
  rect 0.59x0.62 smd: 1(-0.455,0) 2(0.455,0)
  body extent -0.53,-0.28 0.53,0.27, height 0.55
C0603 [mm] "Chip Capacitor, 2-Leads, Body 1,60x0,80mm, IPC Medium Density"
  rect 1.15x1 smd: 1(-0.7,0) 2(0.7,0)
  body extent -0.88,-0.48 0.87,0.47, height 0.95
DO-214AC [mm] "Molded Diode, 2-Leads, Body 4,25x2,67mm, IPC Medium Density"
  rect 2.4x1.2 smd: 1(-1.525,0) 2(1.525,0)
  silkscreen extent -3.02,-1.4 2.25,1.4, body extent -2.25,-1.4 2.25,1.39, height 2.29
DS1021-2X3SF11 [mm]
  rect 1.9x1.9 hole 1: 1(-2.54,-1.27)
  round 1.9 hole 1: 2(-2.54,1.27) 3(0,-1.27)
  round 1.9 hole 1 mask+0.102: 4(0,1.27) 5(2.54,-1.27) 6(2.54,1.27)
  silkscreen extent -4.5,-2.55 3.81,2.54, body extent -3.81,-2.54 3.81,2.54, height 8.59
DS1040-02RN [mm]
  round 1.6 hole 1: 1(-1.27,3.56) 2(-1.27,-4.06) 3(1.27,3.56) 4(1.27,-4.06)
  silkscreen extent -3.27,-5.2 3.27,4.67, body extent -3.27,-5.2 3.27,4.7, height 6.8
HL0603 [mm] "Chip Diode, 2-Leads, Body 1,60x0,80mm, IPC Medium Density"
  rect 0.8x0.95 smd: 1(-0.825,0) 2(0.825,0)
  silkscreen extent -1.49,-0.38 0.05,0.74, body extent -0.85,-0.45 0.85,0.45, height 0.65
R0603 [mm] "Chip Resistor, 2-Leads, Body 1,60x0,80mm, IPC Medium Density"
  rect 0.85x0.9 smd: 1(-0.775,0) 2(0.775,0)
  body extent -0.85,-0.45 0.85,0.45, height 0.55
SSOP-16 [mm] "SOP, 16-Leads, Body 4,90x3,90mm, Pitch 0,64mm, IPC Medium Density"
  oval 1.45x0.45 smd: 1(-2.725,2.24) 2(-2.725,1.6) 3(-2.725,0.96) 4(-2.725,0.32) 5(-2.725,-0.32) 6(-2.725,-0.96) 7(-2.725,-1.6) 8(-2.725,-2.24) 9(2.725,-2.24) 10(2.725,-1.6) 11(2.725,-0.96) 12(2.725,-0.32) 13(2.725,0.32) 14(2.725,0.96) 15(2.725,1.6) 16(2.725,2.24)
  silkscreen extent -2.85,-2.5 1.6,3.14, body extent -2,-2.5 2,2.5, height 1.75
tsop-6 [mm] "Molded Diode, 2-Leads, Body 4,25x2,67mm, IPC Medium Density"
  oval 1x0.6 smd: 1(-1.35,0.95) 2(-1.35,0) 3(-1.35,-0.95) 4(1.35,-0.95) 5(1.35,0) 6(1.35,0.95)
  silkscreen extent -1.47,-1.55 0.45,1.92, body extent -0.85,-1.55 0.85,1.55, height 1.1

## Part data
C1: library part c0006, "=Описание", HelpURL=https://www.yageo.com/upload/media/product/productsearch/datasheet/mlcc/UPY-GPHC_X5R_4V-to-50V_26.pdf, ID=c0006, Корпус=0603, Наименование=CC0603KRX5R8BB475, Номинал="4,7 мк", Номинальное напряжение="25 В", Описание="Конденсатор чип 0603 4,7 мкФ 25 В ±10 %", Отклонение="±10 %", Производитель=Yageo, Рабочие температуры="от -55 °С до +85 °С", Фамилия=Ларионов
C2: library part c0004, "=Описание", HelpURL=https://www.yageo.com/upload/media/product/products/datasheet/mlcc/UPY-GPHC_X7R_6.3V-to-50V_20.pdf, ID=c0004, Корпус=0603, Наименование=CC0603KRX7R8BB105, Номинал="1 мк", Номинальное напряжение="25 В", Описание="Конденсатор чип 0603 1 мкФ 25 В ±10 %", Отклонение="±10 %", Производитель=Yageo, Рабочие температуры="от -55 °С до +125 °С", Фамилия=Ларионов
C3: library part c0002, "=Описание", HelpURL=https://www.yageo.com/upload/media/product/products/datasheet/mlcc/UPY-GPHC_X7R_6.3V-to-50V_20.pdf, ID=c0002, Корпус=0603, Наименование=CC0603JRX7R9BB104, Номинал="0,1 мк", Номинальное напряжение="50 В", Описание="Конденсатор чип 0603 0,1 мкФ 50 В ±5 %", Отклонение="±5 %", Производитель=Yageo, Рабочие температуры="от -55 °С до +125 °С", Фамилия=Ларионов
DD1: library part dd0005, "=Описание", HelpURL=https://www.analog.com/ru/products/adm3485.html#product-samplebuy, ID=dd0005, Корпус=SSOP-16, Наименование=FT220XS, Описание="Преобразователь USB-SPI", Производитель="FTDI Chip", Фамилия="Патрушева, Игнатоа"
HL1: library part hl0006, "=Описание", HelpURL=https://www.vishay.com/leds/list/product-83173/, ID=hl0006, Корпус=0603, Наименование=TLMB1100-GS08, Номинальная длина волны="466 нм", Номинальная сила света="5 мкд", Номинальное падение напряжения="3,9 В", Номинальный прямой ток="30 мА", Описание="Светодиод чип 0603 синий", Примечание="Not for new design", Производитель="Vishay Intertechnology, Inc.", Рабочие температуры="от -40 °С до +100 °С", Рассеиваемая мощность="90 мВт", Фамилия=Ларионов, Цвет=Blue
HL2: library part hl0003, "=Описание", HelpURL=https://www.vishay.com/leds/list/product-83172/, ID=hl0003, Корпус=0603, Наименование=TLMY1000-GS08, Номинальная длина волны="588 нм", Номинальная сила света="7,5 мкд", Номинальное падение напряжения="1,8 В", Номинальный прямой ток="15 мА", Описание="Светодиод чип 0603 желтый", Производитель="Vishay Intertechnology, Inc.", Рабочие температуры="от -40 °С до +100 °С", Рассеиваемая мощность="40 мВт", Фамилия=Ларионов, Цвет=Yellow
L1: library part l0003, "=Описание", HelpURL=https://www.murata.com/en-global/products/productdetail.aspx?partno=BLM15BB470SN1%23, ID=l0003, Корпус=0402, Наименование=BLM15BB470SN1, Описание="Ферритовая бусина 47 Ом ±25 %", Отклонение, 100 Мгц="±25 %", Производитель="Murata Manufacturing Co., Ltd.", Рабочие температуры="от -55 °С до +125 °С", Сопротивление, 100 МГц="47 Ом", Сопротивление при постоянном токе="0,35 Ом", Фамилия="Патрушева, Игнатова"
R1 R4: library part r0005, "=Описание", HelpURL=https://www.yageo.com/upload/media/product/productsearch/datasheet/rchip/PYu-RC_Group_51_RoHS_L_11.pdf, ID=r0005, Корпус=0603, Наименование=RC0603FR-07220RL, Номинал=220, Номинальное напряжение="75 В", Номинальный ток="1 А", Описание="Резистор чип 0603 220 Ом ±1 % 0,1 Вт", Отклонение="±1 %", Производитель=Yageo, Рабочие температуры="от -55 °С до +155 °С", Фамилия=Ларионов
R2 R3 R6: library part r0008, "=Описание", HelpURL=https://www.yageo.com/upload/media/product/productsearch/datasheet/rchip/PYu-RC_Group_51_RoHS_L_11.pdf, ID=r0008, Корпус=0603, Наименование=RC0603FR-0710KL, Номинал="10 к", Номинальное напряжение="75 В", Номинальный ток="1 А", Описание="Резистор чип 0603 10 кОм ±1 % 0,1 Вт", Отклонение="±1 %", Производитель=Yageo, Рабочие температуры="от -55 °С до +155 °С", Фамилия=Самарин
R5 R7 R8 R9: library part r0003, "=Описание", HelpURL=https://www.yageo.com/upload/media/product/productsearch/datasheet/rchip/PYu-RC_Group_51_RoHS_L_11.pdf, ID=r0003, Корпус=0603, Наименование=RC0603FR-0722R, Номинал=22, Номинальное напряжение="75 В", Номинальный ток="1 А", Описание="Резистор чип 0603 22 Ом ±1 % 0,1 Вт", Отклонение="±1 %", Производитель=Yageo, Рабочие температуры="от -55 °С до +155 °С", Фамилия=Ларионов
S1: library part Component_1
VD1 VD3: library part vd0001, "=Описание", HelpURL=https://www.vishay.com/product?docid=88740, ID=vd0001, Импульсное обратное напряжение="30 В", Корпус=DO-214AC, Макс# допустимый средний прямой ток="1,5 А", Наименование=SL13-E3/5AT, Описание="Диод Шоттки 30 В 1,5 А", Пиковое прямое напряжение="0,445 В", Производитель="Vishay Intertechnology, Inc.", Рабочие температуры="от -55 °С до +125 °С", Фамилия=Ларионов
VD2: library part vd0006, "=Описание", HelpURL=https://www.onsemi.com/pub/Collateral/STF202-22T1-D.PDF, ID=vd0006, Корпус=TSOP?6, Наименование=STF202-22T1G, Описание="Диодная сборка для подавления помех, 5 В", Производитель="ON Semiconductor", Фамилия="Патрушева, Игнатова"
X1: library part x0001, Contact_1=VBUS, Contact_2=USBDM, Contact_3=USBDP, Contact_4=ID, Contact_5=GND, HelpURL=https://www.te.com/global-en/product-2108877-1.html, ID=x0001, Наименование=2108877-1, Описание="USB 2.0 Micro USB Type B IP68 гнездо прямой угол", Производитель="TE Connectivity", Фамилия=Ларионов
X2: library part x0003, Contact_1=+5V, Contact_2=MISO, Contact_3=MIOSI0, Contact_4=CLK, Contact_5=CS#, Contact_6=GND, HelpURL=http://www.connfly.com/productshow.aspx?id=118, ID=x0003, Наименование=DS1021-2*3SF11, Описание="PLS 3x2 pin 2,54 мм прямой", Производитель="Connfly Electronic Co. LTD", Фамилия=Самарин

## Via types
v1: diameter 0.6, hole 0.3, Top Layer to Bottom Layer, tented both sides, 70 vias

## Nets (pads, with @x,y where several pads share a name; then routed paths per layer and width w, separated by ;. In a path a pad name is that pad's centre, name@x,y a point inside that pad or via, vN(x,y) a via of type N, cw(c..) or ccw(c..) an arc to the next point about the centre after c; other vN are vias at no path point)
+5V: C1.2 DD1.12 HL2.2 L1.2 R1.2 R2.1 R3.2 R6.2 VD3.2 | length 4.3
  Top Layer w0.15: v1(58.475,73.6) 58.475,72.3 R1.2 ; v1(60.775,70.075) 61.275,69.575 61.275,68.88 HL2.2 ; R2.1 v1(74.05,78.625)
  other v1: 79.275,66.3 80.925,66.325 77.8,66.35 75.275,70.625 75.925,71.05 75.25,71.425 64.275,77.2 64.95,77.2 64.25,78.95 64.95,78.975 64.55,79.575 59.2,81.8 51.95,82.3 56.175,82.35 58.95,82.875 59.1,83.9 51.95,84.15 54.95,84.725
CLK: DD1.15 R5.1 | length 12.3
  Top Layer w0.15: v1(69.6,72.6) 69.613,72.613 71.962,72.613 DD1.15 ; v1(76.85,75.375) 78.35,75.375 R5.1
  Bottom Layer w0.15: v1(69.6,72.6) 72.55,72.6 73.7,73.75 74.402,73.75 76.027,75.375 v1(76.85,75.375)
CN_5V_IN: X1.1 | length 11.4
  Top Layer w0.3: X1.1 51.775,77.575 53.1,78.9 53.7,78.9 54.15,79.35 ; 54.15,79.675 54.15,79.35 ; 58.975,78.075 58.025,78.075 57.475,78.625 54.6,78.625 54.15,79.075 54.15,79.35
CN_CLK: R5.2 X2.4 | length 8.9
  Top Layer w0.15: R5.2@80.16,75.165 R5.2 79.925,75.375 80.275,75.025 81.75,75.025 82.925,73.85 86.175,73.85 X2.4
CN_CS#: R9.2 X2.5 | length 5.5
  Top Layer w0.15: R9.2@80.1,73.775 R9.2 81.85,73.625 83.015,72.46 X2.5
CN_D_N: VD2.2 X1.2 | length 9.9
  Top Layer w0.155: X1.2 49.65,76.975 49.747,76.878 54.265,76.878 54.34,76.803 58.473,76.803 58.795,77.125 VD2.2
CN_D_P: VD2.3 X1.3 | length 9.9
  Top Layer w0.155: X1.3 49.65,76.475 49.747,76.572 54.139,76.572 54.214,76.497 58.473,76.497 58.795,76.175 VD2.3
CN_MISO: R7.2 X2.2 | length 10
  Top Layer w0.15: R7.2@80.35,78.475 80,78.825 R7.2 82,78.85 82.964,77.886 82.964,77.179 83.992,76.15 85.935,76.15 X2.2
CN_MOSI: R8.2 X2.3 | length 5.7
  Top Layer w0.15: R8.2@79.95,77.075 82.689,77.075 82.689,77.065 83.878,75.875 83.91,75.875 X2.3
CS#: DD1.14 R9.1 S1.2 | length 22.7
  Top Layer w0.15: v1(70.25,72.05) 70.282,72.018 71.943,72.018 DD1.14 ; v1(76.85,73.575) 78.35,73.575 R9.1
  Bottom Layer w0.15: S1.2 65.189,75.79 64.725,75.326 64.725,72.25 64.925,72.05 v1(70.25,72.05) 72.75,72.05 74.05,73.35 75.277,73.35 75.502,73.575 v1(76.85,73.575)
GND: C1.1 C2.1 C3.1 DD1.5 DD1.13 HL1.1 VD2.6 X1.5 X1.TP1 X2.6
  other v1: 51.675,65.925 54.5,66.025 65.25,66.025 62.95,66.05 67.525,66.05 57.4,66.075 60.3,66.075 71.1,66.175 73.725,66.25 74.825,66.25 76.025,66.25 84.475,66.275 82.65,66.3 85.75,70.075 70.275,71.3 75.7,72.675 57.2,74.675 59.975,74.7 53.5,75.025 65.975,77.175 50.35,78.45 66.025,79 71.425,80.675 68.3,81.275 74.025,83.775 76.55,83.8 79.3,83.825 81.7,83.875 84.6,83.875 50.8,84.475 56.45,84.5 53.325,84.6 58.2,84.725
MISO: DD1.7 R7.1 S1.4 | length 34.3
  Top Layer w0.15: DD1.7 66.512,69.413 65.038,69.413 v1(65.025,69.4) 65.025,73.975 65.725,74.675 69.875,74.675 70.03,74.83 70.03,74.908 70.52,75.398 S1.4 ; v1(76.925,78.875) 78.425,78.875 R7.1
  Bottom Layer w0.15: v1(65.025,69.4) 65.025,71.561 64.45,72.136 64.45,75.45 65.1,76.1 66.825,76.1 67.515,76.79 72.615,76.79 72.675,76.85 74.9,76.85 v1(76.925,78.875)
MOSI: DD1.1 R8.1 | length 13.9
  Top Layer w0.15: DD1.1 66.582,73.208 67.692,73.208 v1(67.775,73.125) ; v1(76.875,77) 78.3,77 R8.1
  Bottom Layer w0.15: v1(67.775,73.125) 67.8,73.15 67.8,73.65 68.665,74.515 74.39,74.515 v1(76.875,77)
NetC2_2: C2.2 C3.2 DD1.3 DD1.10 | length 10.6
  Top Layer w0.3: DD1.3 67.066,71.985 67.206,71.845 67.255,71.845 69.625,69.475 70.505,69.475 70.555,69.425 DD1.10 73.5,69.425 73.9,69.025 C3.2 C2.2 C2.2@75.725,68.95 ; C2.2@75.725,68.925 C2.2@75.725,68.95 ; C2.2@75.725,69 C2.2@75.725,68.95
NetHL1_2: HL1.2 R1.1 | length 2.3
  Top Layer w0.15: HL1.2 57.625,68.855 57.625,69.875 58.475,70.725 R1.1
NetHL2_1: HL2.1 R4.2 | length 2.2
  Top Layer w0.15: R4.2 62.125,69.689 62.892,68.922 HL2.1
NetL1_1: L1.1 VD1.1 VD2.1 | length 9.4
  Top Layer w0.3: VD1.1@54.575,79.675 61.715,79.675 63.155,78.235 63.17,78.235 63.315,78.09 L1.1
NetR3_1: R3.1 S1.1 | length 6.6
  Top Layer w0.15: R3.1 66.845,82.275 S1.1
NetR6_1: R6.1 S1.3 | length 9.3
  Top Layer w0.15: R6.1 63.025,84.025 63.15,83.9 65.884,83.9 66.394,84.41 69.52,84.41 S1.3
NetVD3_1: VD3.1 X2.1 | length 16.2
  Top Layer w0.3: VD3.1 79.3,71 v1(82.05,71) ; v1(84.725,80.4) 84.725,77.6 X2.1
  Bottom Layer w0.3: v1(82.05,71) 82.05,73.8 83.25,75 83.25,78.925 v1(84.725,80.4)
Reset#: DD1.11 R2.2 | length 13
  Top Layer w0.15: DD1.11 69.76,70.065 69,70.825 69,73.987 69.088,74.075 73.912,74.075 74.05,74.213 R2.2
SPI_LINK: DD1.16 R4.1 | length 39.6
  Top Layer w0.15: R4.1 v1(62.125,73.6) ; v1(70.325,73.2) 71.91,73.2 DD1.16
  Bottom Layer w0.15: v1(62.125,73.6) 62.125,74.425 64.375,76.675 66.182,76.675 66.207,76.7 66.5,76.7 67.175,77.375 74.275,77.375 77.075,80.175 77.225,80.175 77.425,79.975 77.425,78.038 77.337,77.95 76.8,77.95 74.9,76.05 72.194,76.05 70.934,74.79 68.551,74.79 67.275,73.514 67.275,72.918 67.568,72.625 68.777,72.625 69.352,73.2 v1(70.325,73.2)
USB_D_N: DD1.9 VD2.5 | length 24.6
  Top Layer w0.15: VD2.5@61.713,77.087 v1@63.038,77.087 ; v1@69.654,68.785 DD1.9
  Top Layer w0.402: VD2.5 VD2.5@61.713,77.087 ; v1@63.038,77.087 v1(63.075,77.05) ; v1(69.65,68.9) 69.539,68.9 v1@69.654,68.785
  Bottom Layer w0.15: v1@63.021,77.05 62.81,76.839 62.246,76.839 61.307,76.839 60.748,76.28 60.748,70.796 61.973,69.571 61.973,67.782 62.532,67.223 68.554,67.223 69.612,68.281 v1@69.612,68.862
  Bottom Layer w0.402: v1@63.021,77.05 v1(63.075,77.05) ; v1@69.612,68.862 v1(69.65,68.9)
USB_D_P: DD1.8 VD2.4 | length 21.7
  Top Layer w0.15: VD2.4@61.929,76.175 62.029,76.075 v1(63.025,76.075) ; DD1.8 v1@68.871,68.785
  Top Layer w0.402: VD2.4 VD2.4@61.929,76.175 ; v1@68.871,68.785 68.986,68.9 v1(68.875,68.9)
  Bottom Layer w0.15: v1@62.971,76.075 62.76,76.286 62.017,76.286 61.536,76.286 61.3,76.051 61.3,71.025 62.525,69.8 62.525,68.011 62.761,67.775 68.325,67.775 68.837,68.287 v1@68.837,68.862
  Bottom Layer w0.402: v1@62.971,76.075 v1(63.025,76.075) ; v1@68.837,68.862 v1(68.875,68.9)
pads on no net: DD1.2 DD1.4 DD1.6 VD1.2 X1.4

## Polygon pours and split planes (outlines as drawn)
no net on Top Layer "Top Layer-NetC2_2" (solid, pour order 20): 73.05,70.025 73.075,70 76.775,70 76.725,69.95 76.725,68.3 76.625,68.4 73.05,68.4
no net on Top Layer "Top Layer-No Net 2" (solid, pour order 38): 52.075,80.025
+5V on Top Layer "Top Layer-+5V 3" (solid, pour order 36): 51.25,81.75 51.25,85.1 51.3,85.15 56.75,85.15 56.75,81.775 56.725,81.75
GND on Top Layer "Top Layer-GND" (solid, pour order 30): 43.475,85.525 43.55,64.875 89.9,64.875 89.9,85.425
+5V on Top Layer "Top Layer-+5V" (solid, pour order 24): 77.4,69.05 77.35,69 77.35,65.95 81.25,65.95 81.5,65.95 81.5,66.05 81.5,69.075
GND on Top Layer "Top Layer-GND 2" (solid, pour order 22): 73.05,68.05 73.05,66.025 73.275,65.8 76.625,65.8 76.9,66.075 76.925,66.1 76.925,66.125 76.925,68.05
+5V on Top Layer "Top Layer-+5V 1" (solid, pour order 18): 70.925,71.025 70.925,70.4 71.15,70.175 76.35,70.175 76.35,71.85 73.075,71.85 73.075,71.025
+5V on Top Layer "Top Layer-+5V 2" (solid, pour order 16): 61.05,84.875 61.05,81.25 60.95,81.15 59.075,81.15 58.45,81.775 58.45,84 59.325,84.875
GND on Top Layer "Top Layer-GND 1" (solid, pour order 14): 63.925,76.85 65.3,76.85 65.3,79.95 63.925,79.95
no net on Top Layer "Top Layer-No Net 1" (solid, pour order 10): 63.475,78.35
no net on Top Layer "Top Layer-No Net" (solid, pour order 4): 50,100.025
GND on Signal Layer 1 "Signal Layer 1-GND" (solid, pour order 6): 43.675,85.375 64.625,85.375 90.025,85.375 90.025,64.825 43.675,64.825
+5V on Signal Layer 2 "Signal Layer 2-+5V" (solid, pour order 8): 43.675,85.375 43.675,64.825 90.025,64.825 90.025,85.375
GND on Bottom Layer "Bottom Layer-GND" (solid, pour order 34): 43.675,85.4 43.675,64.85 90,64.85 90,85.375 90.025,85.4

## Silkscreen, mask and mechanical layers (free items; w line width, h text height)
Top Overlay:
  text "USB / SPI" at 75.125,80.35 h2
  text "PWR" at 56.85,66.5 h1.2
  text "LINK" at 60.45,66.5 h1.2
Board:
  the board outline again, w0.1
Assembly Notes (Mech5):
  text "Преобразователь USB-SPI" at 43.65,62.375 h2
  text "Лабораторная №1_СПБПУ271020.07[lab_1_patrusheva_usb_spi.PcbDoc]" at 43.45,59.225 h2
Top Designator:
  text "DD1" at 67.45,69.75 h1.2